# EAGLE board HackmodWear_workingcopy3 (EAGLE 9.1.0)
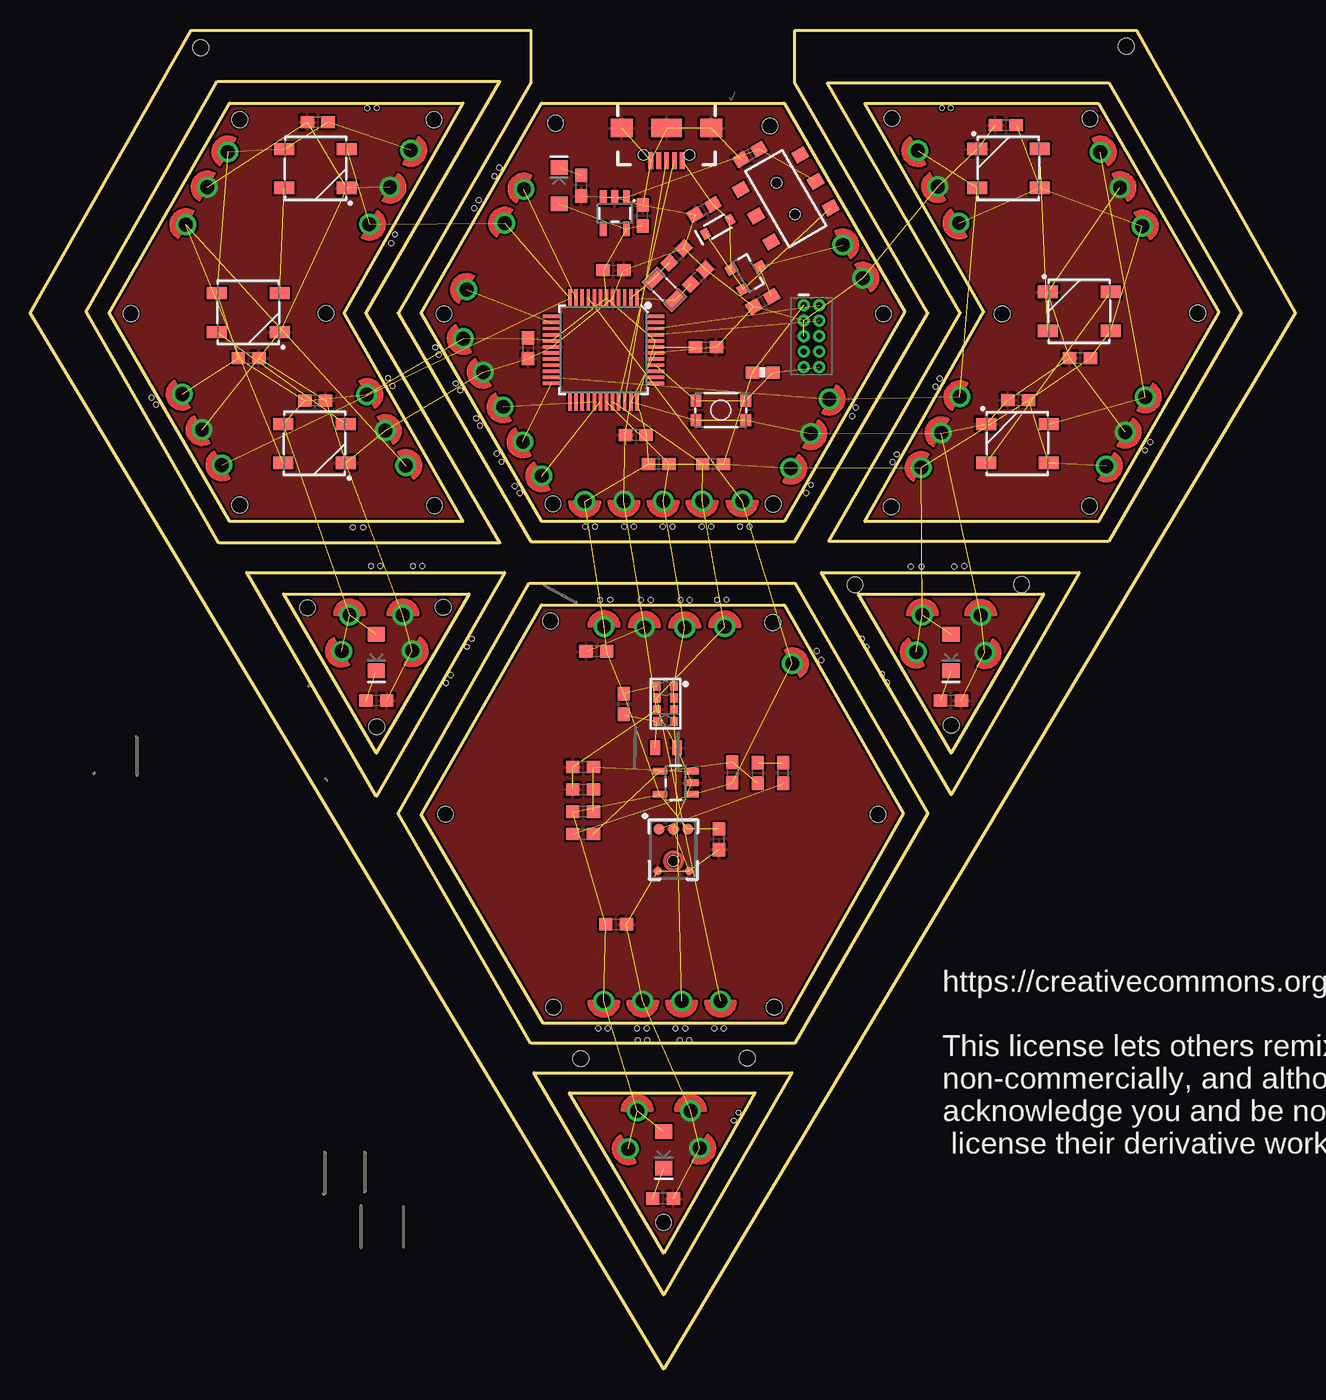
[diagram p0: board, top side]
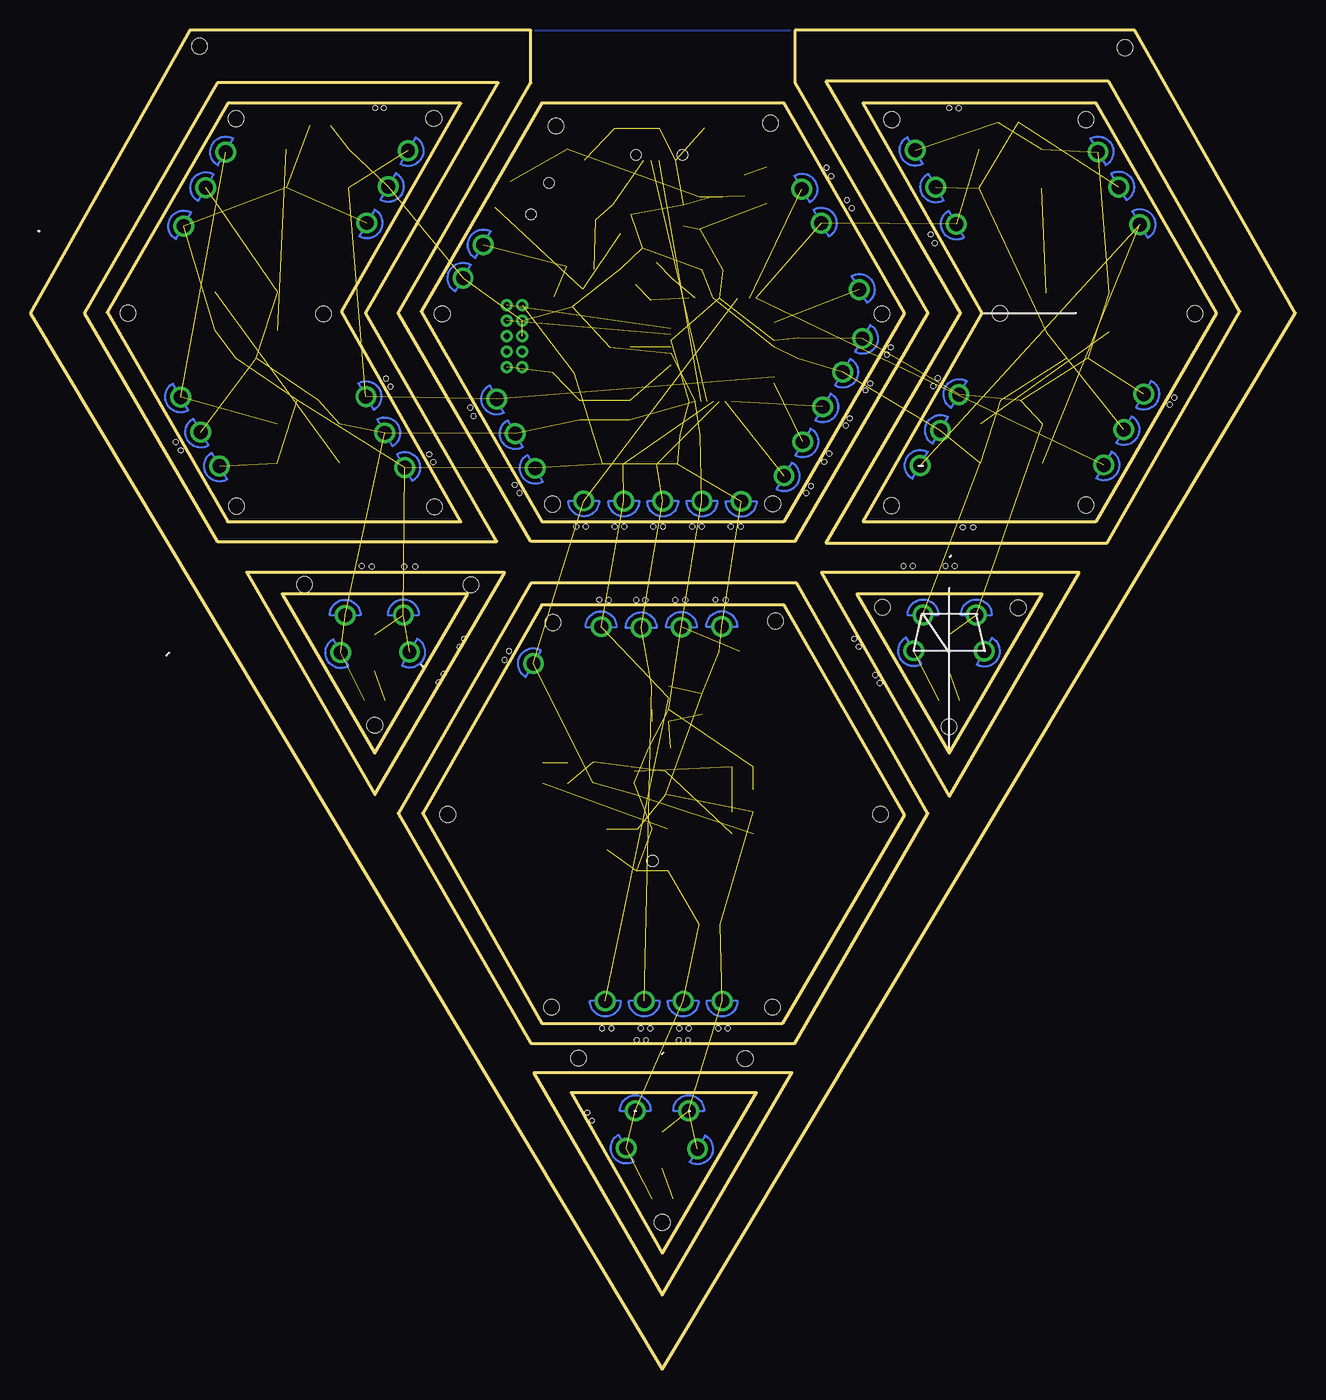
[diagram p1: board, bottom side, seen from below]

Size 104.01 x 110.11 mm. Coordinates in mm from the lower left corner, seen from the top.
Outline: 16.38,104.14 35.56,104.14 25.78,86.87 35.56,69.72 16.38,69.72 6.48,86.87 16.38,104.14
Outline: 15.37,105.92 38.61,105.92 27.56,86.87 38.61,67.94 15.49,67.94 4.57,87 15.37,105.92
Outline: 13.21,110.11 41.15,110.11 41.15,105.79 30.23,86.87 41.15,68.07 62.86,68.07 73.79,86.87 62.86,105.79 62.86,110.11 90.93,110.11 104.01,86.87 52.07,0 0,86.87 13.21,110.11
Outline: 42.04,104.14 61.98,104.14 71.88,87 61.98,69.72 42.04,69.72 32.13,86.87 42.04,104.14
Outline: 65.53,105.79 88.65,105.79 99.57,86.87 88.65,68.07 65.66,68.07 76.45,86.87 65.53,105.79
Outline: 17.78,65.53 38.99,65.53 28.45,47.12 17.78,65.53
Outline: 20.83,63.75 36.07,63.75 28.45,50.67 20.83,63.75
Outline: 41.02,64.64 62.86,64.64 73.79,45.72 62.86,26.8 41.15,26.8 30.23,45.72 41.02,64.64
Outline: 42.04,62.87 61.98,62.87 71.75,45.72 61.98,28.45 42.16,28.45 32.13,45.59 42.04,62.87
Outline: 65.02,65.53 86.23,65.53 75.69,47.24 65.02,65.53
Outline: 68.07,63.75 83.31,63.75 75.69,50.67 68.07,63.75
Outline: 41.4,24.38 62.61,24.38 52.07,6.1 41.4,24.38
Outline: 44.32,22.73 59.56,22.73 52.07,9.53 44.32,22.73
Outline: 87.8,69.7 68.62,69.7 78.4,86.97 68.62,104.12 87.8,104.12 97.7,86.92 87.8,69.7
Copper layers (1*16): Top 0.035mm / dielectric 1.5mm / Bottom 0.035mm
Design rules "SparkFun-2-layer-TIGHT": minimum track width 7mil, minimum drill 15mil, track to track 7mil, track to pad 7mil, pad to pad 7mil, via to via 7mil, smd to smd 7mil, copper to edge 7mil, drill to drill 7mil, minimum pad ring 7mil, minimum via ring 7mil, stop-mask expansion 4mil, vias tented up to drill 25mil, thermal gap 10mil
Holes 1.27 mm at 33.22,71.02 33.19,102.77 43.01,29.76 69.69,45.62 61.08,71.15 22.8,62.61 28.47,52.83 61.16,29.76 33.95,62.65 90.11,108.81 70.84,102.87 70.78,70.93 87.12,102.85 42.75,61.54 61.03,61.41 42.97,71.17 34,86.8 43.17,102.48 8.27,86.82 17.22,102.76 17.21,71.07 79.91,86.79 87.08,70.99 24.3,86.84 14.01,108.69 34.12,45.65 60.8,102.25 70.14,86.79 95.98,86.86 67.79,64.5 75.71,52.97 81.49,64.53 45.24,25.54 52.06,12.07 58.94,25.57
Holes 0.38 mm at 27.69,103.72 28.47,103.73 29.67,92.61 29.97,93.32 29.4,81.51 29.77,80.85 33.29,84.04 33.58,83.45 34.97,81.07 35.35,80.5 36.96,77.6 36.65,78.2 38.33,75.29 38.73,74.62 39.83,72.62 40.23,72.06 45.61,69.3 46.42,69.3 48.83,69.3 49.61,69.29 52.01,69.3 52.8,69.31 55.19,69.31 55.97,69.3 58.34,69.3 59.12,69.3 64.66,59.07 65.03,58.33 57.23,63.27 56.45,63.26 54.21,63.26 53.45,63.26 51.01,63.27 50.17,63.27 47.68,63.28 46.84,63.27 28.01,66.04 27.36,69.23 26.5,69.24 28.77,66.04 31.46,66.04 32.23,66.04 92.07,76.26 91.65,75.57 74.78,81.47 67.85,79.08 74.41,80.81 71.22,75.24 70.88,74.59 36.49,95.47 36.87,96.13 38.15,98.12 38.55,98.82 67.58,78.39 63.8,72.06 64.19,72.73 36.28,60.07 35.89,59.42 34.55,57.09 34.17,56.42 72.38,66.01 73.26,66.02 75.95,66.02 76.78,66.04 70.43,56.46 70.02,57.18 68.74,59.4 68.35,60.07 49.95,27.06 50.71,27.06 53.4,27.06 54.17,27.06 58.22,21.09 57.83,20.44 57.01,28.02 56.23,28.01 53.84,28.02 53.04,28.02 50.66,28.02 49.88,28.02 47.46,28.03 46.68,28.02 74.95,103.73 75.67,103.73 9.96,79.91 10.32,79.32

## Footprints (pad centres in the part's own frame; a part is rotated, then mirrored left to right if it is on the bottom)
0603 = smd 1.1 x 1: 1 -0.85,0; 2 0.85,0
0805 = smd 0.8 x 1.2: 1 -0.9,0; 2 0.9,0
LED-1206 = smd 1.2 x 1.4: A -1.5,0; C 1.5,0
WS2812B = smd 1.651 x 1: 1 2.577,-1.6; 2 2.577,1.6; 3 -2.577,1.6; 4 -2.577,-1.6
SOD-323 = smd 0.63 x 0.83: A 1.15,0; C -1.15,0
1X01 = drill 1.143: P$1 0,0
USB-AB-MICRO-SMD_V03 = smd 1.4 x 0.4: D+1 2.7,0; D-1 2.7,0.65; GND1 2.7,-1.3; ID1 2.7,-0.65; VBUS1 2.7,1.3 | smd 1.5 x 1.8: SHIELD1 0,3.68; SHIELD3 0,-3.68 | smd 1.5 x 2.5: SHIELD2 0,0 | hole 0.85: 2.2,1.9; 2.2,-1.9
2X5-PTH-1.27MM = drill 0.508 pad 1: 1 -2.54,-0.635; 2 -2.54,0.635; 3 -1.27,-0.635; 4 -1.27,0.635; 5 0,-0.635; 6 0,0.635; 7 1.27,-0.635; 8 1.27,0.635; 9 2.54,-0.635; 10 2.54,0.635
SOT23-3 = smd 0.8 x 0.9: 1 -0.95,-1; 2 0.95,-1; 3 0,1.1
0603-RES@1 = smd 1.1 x 1: 1 -0.85,0; 2 0.85,0
TACTILE_SWITCH_SMD_4.6X2.8MM = smd 0.9 x 1: 1 -2.05,-0.8; 2 2.05,-0.8; 3 2.05,0.8; 4 -2.05,0.8
SWITCH_DPDT_SMD_AYZ0202 = smd 1 x 1.15: 1 -2.5,2.825; 2 0,2.825; 3 2.5,2.825; 4 -2.5,-2.825; 5 0,-2.825; 6 2.5,-2.825 | hole 0.85: 1.5,0; -1.5,0
TQFP-48 = smd 1.5 x 0.28: 1 -4.25,2.75; 2 -4.25,2.25; 3 -4.25,1.75; 4 -4.25,1.25; 5 -4.25,0.75; 6 -4.25,0.25; 7 -4.25,-0.25; 8 -4.25,-0.75; 9 -4.25,-1.25; 10 -4.25,-1.75; 11 -4.25,-2.25; 12 -4.25,-2.75; 25 4.25,-2.75; 26 4.25,-2.25; 27 4.25,-1.75; 28 4.25,-1.25; 29 4.25,-0.75; 30 4.25,-0.25; 31 4.25,0.25; 32 4.25,0.75; 33 4.25,1.25; 34 4.25,1.75; 35 4.25,2.25; 36 4.25,2.75 | smd 0.28 x 1.5: 13 -2.75,-4.25; 14 -2.25,-4.25; 15 -1.75,-4.25; 16 -1.25,-4.25; 17 -0.75,-4.25; 18 -0.25,-4.25; 19 0.25,-4.25; 20 0.75,-4.25; 21 1.25,-4.25; 22 1.75,-4.25; 23 2.25,-4.25; 24 2.75,-4.25; 37 2.75,4.25; 38 2.25,4.25; 39 1.75,4.25; 40 1.25,4.25; 41 0.75,4.25; 42 0.25,4.25; 43 -0.25,4.25; 44 -0.75,4.25; 45 -1.25,4.25; 46 -1.75,4.25; 47 -2.25,4.25; 48 -2.75,4.25
SOT23-5 = smd 0.55 x 1.2: 1 -0.95,-1.3; 2 0,-1.3; 3 0.95,-1.3; 4 0.95,1.3; 5 -0.95,1.3
ADMP401 = smd 0.9 x 0.9: 1 -1.2,2.62; 5 1.2,2.62; 6 0,2.62 | smd 0.7 x 0.7: 2 1.3,-0.8; 4 -1.3,-0.8 | hole 0.9: 0,0
APDS-9960 = smd 0.6 x 0.72: 1 0.7,1.455; 2 0.7,0.485; 3 0.7,-0.485; 4 0.7,-1.455; 5 -0.7,-1.455; 6 -0.7,-0.485; 7 -0.7,0.485; 8 -0.7,1.455
CRYSTAL-SMD-3.2X1.5MM = smd 1 x 1.8: P$1 -1.25,0; P$2 1.25,0

## Placement (x,y rotation side)
C1  0.1uF  [0603]  49.77,76.82 180 top
C2  0.1uF  [0603]  55.55,84.05 0 top
C3  0.1uF  [0603]  47.94,90.39 0 top
C4  0.1uF  [0603]  40.91,83.96 270 top
C5  15pF  [0603]  54.9,89.85 225 top
C6  15pF  [0603]  53.12,91.59 45 top
C7  0.1uF  [0603]  59.16,99.91 210 top
C8  0.1uF  [0603]  48.16,36.59 0 top
C9  10uF  [0603]  60.22,87.8 210 top
C10  10uF  [0603]  50.34,94.89 90 top
C13  10uF  [0805]  52.27,51.1 0 top
C15  1.0uF  [0603]  46.54,59.04 180 top
C17  100pF  [0603]  57.72,49.07 270 top
C18  0.1uF  [0603]  56.62,43.58 90 top
C19  4.7uF  [0603]  61.9,49.02 90 top
C20  1.0uF  [0603]  45.44,49.52 180 top
C21  0.1uF  [0603]  17.94,83.15 0 top
C22  0.1uF  [0603]  23.62,102.55 180 top
C23  0.1uF  [0603]  23.42,79.67 0 top
C24  0.1uF  [0603]  80.2,102.3 180 top
C25  0.1uF  [0603]  86.3,83.15 180 top
C26  0.1uF  [0603]  81.22,79.69 180 top
D1  [LED-1206]  75.69,58.93 270 top
D2  WS2812B  [WS2812B]  80.42,98.76 0 top
D3  [LED-1206]  52.07,18.03 270 top
D4  [LED-1206]  28.45,58.93 270 top
D5  WS2812B  [WS2812B]  86.23,87 0 top
D6  WS2812B  [WS2812B]  81.15,76.14 0 top
D7  [LED-1206]  43.47,97.34 90 top
D8  1A/23V/620mV  [SOD-323]  56.51,93.96 30 top
D31  WS2812B  [WS2812B]  23.44,98.75 180 top
D32  WS2812B  [WS2812B]  17.91,86.9 180 top
D33  WS2812B  [WS2812B]  23.36,76.14 180 top
J3  [1X01]  40.5,76.27 120 top
J4  [1X01]  30.63,62.03 0 top
J5  [1X01]  42.05,73.47 120 top
J6  [1X01]  37.23,82 120 top
J7  [1X01]  73.24,74.16 60 top
J8  [1X01]  40.58,97.05 60 top
J9  [1X01]  39,94.25 60 top
J10  [1X01]  58.52,71.41 180 top
J11  [1X01]  48.8,71.4 180 top
J12  [1X01]  52.03,71.4 180 top
J13  [1X01]  56.74,30.27 180 top
J14  [1X01]  65.67,79.79 243 top
J15  [1X01]  57.09,61.06 0 top
J16  [1X01]  53.79,60.98 0 top
J17  [1X01]  47.17,61.07 0 top
J18  [1X01]  38.86,79.15 120 top
J19  [1X01]  50.49,61.02 0 top
J20  [1X01]  26.24,62.03 0 top
J23  [1X01]  35.87,88.8 60 top
J25  [1X01]  31.27,100.24 240 top
J26  [1X01]  15.75,74.37 120 top
J27  [1X01]  29.18,77.2 300 top
J28  [1X01]  47.14,30.27 180 top
J29  [1X01]  50.34,30.27 180 top
J32  [1X01]  27.88,94.17 240 top
J33  [1X01]  14.54,97.22 60 top
J34  [1X01]  16.24,100.11 60 top
J37  [1X01]  62.65,58.02 300 top
J38  [1X01]  55.23,71.41 180 top
J39  [1X01]  53.54,30.27 180 top
J41  [1X01]  12.79,94.13 60 top
J42  [1X01]  76.43,79.98 60 top
J43  [1X01]  29.57,97.22 240 top
J44  [1X01]  27.66,80.16 300 top
J45  [1X01]  12.48,80.19 120 top
J46  [1X01]  14.11,77.28 120 top
J47  [1X01]  76.35,94.27 120 top
J48  [1X01]  87.96,100.1 300 top
J49  [1X01]  89.59,97.17 300 top
J50  [1X01]  91.66,79.96 240 top
J51  [1X01]  74.6,97.27 120 top
J52  [1X01]  91.41,94.02 300 top
J53  [1X01]  72.97,100.22 120 top
J54  [1X01]  30.86,74.33 300 top
J55  [1X01]  74.88,77.01 60 top
J56  [1X01]  35.6,84.77 120 top
J57  [1X01]  88.46,74.28 240 top
J58  [1X01]  90,77.07 240 top
J59  [1X01]  78.48,58.93 240 top
J62  [1X01]  72.84,58.97 120 top
J63  [1X01]  78.13,62 0 top
J64  [1X01]  73.34,62.04 0 top
J65  [1X01]  54.28,21.25 0 top
J68  [1X01]  49.17,18.13 120 top
J69  [1X01]  55.02,18.18 240 top
J70  [1X01]  49.89,21.25 0 top
J71  [1X01]  66.78,92.46 300 top
J72  [1X01]  68.44,89.73 300 top
J73  [1X01]  45.57,71.37 180 top
J74  [1X01]  31.38,59.08 240 top
J75  [1X01]  64.15,76.94 240 top
J76  [1X01]  62.5,74.09 240 top
J77  [1X01]  25.59,59.05 120 top
JP3  [USB-AB-MICRO-SMD_V03]  52.3,102.07 270 top
JP5  CORTEX_DEBUGPTH  [2X5-PTH-1.27MM]  64.22,84.96 270 top
Q1  ZXMP6A13F  [SOT23-3]  58.98,90.13 300 top
R1  10K  [0603-RES@1]  60.21,81.97 180 top
R2  330  [0603]  28.45,54.99 180 top
R3  4.7k  [0603]  51.66,74.45 180 top
R4  100k  [0603]  55.38,95.37 30 top
R5  4.7k  [0603]  56.13,74.45 180 top
R6  1k  [0603]  45.3,97.34 90 top
R9  10k  [0603]  45.44,45.84 180 top
R11  10k  [0603]  45.44,47.68 0 top
R12  1.5k  [0603]  59.82,49.02 90 top
R13  100k  [0603]  45.44,44 0 top
R15  330  [0603]  75.69,54.99 180 top
R17  330  [0603]  52.02,14.02 180 top
R29  0  [0603]  48.79,54.7 90 top
S1  RESET  [TACTILE_SWITCH_SMD_4.6X2.8MM]  56.78,78.86 0 top
S2  [SWITCH_DPDT_SMD_AYZ0202]  62.11,96.28 300 top
U1  ATSAMD21G-A  [TQFP-48]  47.11,83.83 270 top
U2  3.3V  [SOT23-5]  48.05,95.07 180 top
U5  OPA344  [SOT23-5]  53.06,48.22 90 top
U6  ADMP401  [ADMP401]  52.87,41.79 0 top
U7  APDS-9960  [APDS-9960]  52.21,54.72 0 top
U$1  [A5L-LOC]  -21.34,-11.05 0 top  (outside the outline)
Y1  32.768kHz  [CRYSTAL-SMD-3.2X1.5MM]  52.14,88.82 315 top

## Library data of the parts
C1-C4 C7 C8 C18 C21-C26 = SparkFun-Capacitors; PROD_ID: CAP-00810
C5 C6 = SparkFun-Capacitors; PROD_ID: CAP-07881
C9 C10 = SparkFun-Capacitors; PROD_ID: CAP-11015
C13 = SparkFun-Capacitors; PROD_ID: CAP-11330
C15 C20 = SparkFun-Capacitors; PROD_ID: CAP-00868
C17 = SparkFun-Capacitors; PROD_ID: CAP-07883
C19 = SparkFun-Capacitors; PROD_ID: CAP-08280
D1 D3 D4 D7 = SparkFun-LED
D2 D5 D6 D31-D33 = SparkFun-LED; PROD_ID: DIO-12503
D8 = SparkFun-DiscreteSemi; PROD_ID: DIO-11623
J3-J20 J23 J25-J29 J32-J34 J37-J39 J41-J59 J62-J65 J68-J77 = SparkFun-Connectors
JP3 = SparkFun-Connectors; PROD_ID: CONN-11794
JP5 = samd21-temp
Q1 = SparkFun-DiscreteSemi; PROD_ID: TRANS-08285
R1 R9 R11 = SparkFun-Resistors; PROD_ID: RES-00824
R2 R6 R15 R17 = SparkFun-Resistors; PROD_ID: RES-00818
R3 R5 = SparkFun-Resistors; PROD_ID: RES-07857
R4 R13 = SparkFun-Resistors; PROD_ID: RES-07828
R12 = SparkFun-Resistors; PROD_ID: RES-08306
R29 = SparkFun-Resistors; PROD_ID: RES-08609
S1 = samd21-temp; PROD_ID: SWCH-13065
S2 = SparkFun-Switches; PROD_ID: SWCH-08179; SF_ID: COM-00597
U1 = samd21-temp; PROD_ID: IC-13064
U2 = SparkFun-PowerIC; PROD_ID: VREG-12457
U5 = SparkFun
U6 = SparkFun-Sensors; PROD_ID: IC-09773
U7 = SparkFun-Sensors; PROD_ID: SEN-12005
U$1 = frames
Y1 = samd21-temp; PROD_ID: XTAL-13062

## Nets
3.3V: C1.1 C3.1 C4.1 C8.1 C10.1 C15.1 C18.2 C21.1 C22.1 C23.1 C24.1 C25.1 C26.1 D1.A D2.1 D3.A D4.A D5.1 D6.1 D7.A D31.1 D32.1 D33.1 J7.P$1 J17.P$1 J20.P$1 J25.P$1 J28.P$1 J34.P$1 J44.P$1 J45.P$1 J47.P$1 J52.P$1 J56.P$1 J57.P$1 J62.P$1 J64.P$1 J68.P$1 J70.P$1 J73.P$1 J76.P$1 J77.P$1 JP5.1 R1.2 R3.2 R5.1 R9.2 R29.2 U1.6 U1.17 U1.36 U1.44 U2.5 U5.5 U6.5 U7.8
!RESET: JP5.10 R1.1 S1.3 S1.4 U1.40
A0: U1.3
A1: U1.7
A2: U1.8
A3: C17.2 J10.P$1 J37.P$1 R13.1 U1.9 U5.1
D0/RXI: U1.16
D1/TXO: U1.15
D2: D2.4 J14.P$1 J42.P$1 J53.P$1 U1.23
D3: J23.P$1 U1.14
D4: U1.13
D5: J3.P$1 U1.24
D6: J18.P$1 U1.29
D7: J5.P$1 U1.30
D8: J8.P$1 U1.11
D9: D31.4 J9.P$1 J26.P$1 J32.P$1 U1.12
D10/SS: U1.27
D11/MOSI: U1.25
D12/MISO: U1.28
D13/SCK: U1.26
DO: D33.2 J41.P$1 J54.P$1
DOUT: D6.2 J48.P$1 J50.P$1
GND: C1.2 C2.2 C3.2 C4.2 C5.1 C6.2 C7.2 C8.2 C9.2 C10.2 C13.2 C15.2 C18.1 C20.2 C21.2 C22.2 C23.2 C24.2 C25.2 C26.2 D2.3 D5.3 D6.3 D31.3 D32.3 D33.3 J4.P$1 J6.P$1 J11.P$1 J19.P$1 J27.P$1 J29.P$1 J33.P$1 J43.P$1 J46.P$1 J49.P$1 J51.P$1 J55.P$1 J58.P$1 J59.P$1 J63.P$1 J65.P$1 J69.P$1 J72.P$1 J74.P$1 J75.P$1 JP3.GND1 JP3.SHIELD1 JP3.SHIELD2 JP3.SHIELD3 JP5.3 JP5.5 R2.1 R4.1 R6.1 R11.1 R15.1 R17.1 S1.1 S1.2 U1.5 U1.18 U1.35 U1.42 U2.2 U5.2 U6.2 U6.4 U6.6 U7.6
ID: JP3.ID1
IN: C7.1 S2.2 U2.1 U2.3
LEDA: C13.1 R29.1 U7.5
N$1: D4.C R2.2
N$2: C5.2 U1.1 Y1.P$2
N$3: C19.1 U6.1
N$4: C6.1 U1.2 Y1.P$1
N$5: U7.3 U7.4
N$6: C17.1 R12.1 R13.2 U5.4
N$7: D7.C R6.2
N$8: D8.C Q1.2 S2.3
N$10: C19.2 R12.2
N$11: C20.1 R9.1 R11.2 U5.3
N$12: D1.C R15.2
N$14: D31.2 D32.4
N$15: D3.C R17.2
N$16: D32.2 D33.4
N$22: D2.2 D5.4
N$23: D5.2 D6.4
SCL: J13.P$1 J15.P$1 J38.P$1 R5.2 U1.32 U7.7
SDA: J12.P$1 J16.P$1 J39.P$1 R3.1 U1.31 U7.1
SWCLK: JP5.4 U1.45
SWDIO: JP5.2 U1.46
USB_D+: JP3.D+1 U1.34
USB_D-: JP3.D-1 U1.33
VBUS: D8.A JP3.VBUS1 Q1.1 R4.2
VDDCORE: C2.1 U1.43
VIN: C9.1 J71.P$1 Q1.3

## Tracks (layer width: path | path; a pad name or v marks a point on that pad's centre or on a via)
3.3V  (55 unrouted)
!RESET  (4 unrouted)
A3  (5 unrouted)
D2  (4 unrouted)
D3  (1 unrouted)
D5  (1 unrouted)
D6  (1 unrouted)
D7  (1 unrouted)
D8  (1 unrouted)
D9  (4 unrouted)
DO  (2 unrouted)
DOUT  (2 unrouted)
GND  (69 unrouted)
  pour Top: 13.28,110.12 90.6,110.12 104.01,86.9 52,1.1 -0.15,86.86
  pour Bottom: 13.28,110.09 88.04,110.13 90.61,110.13
IN  (3 unrouted)
LEDA  (2 unrouted)
N$1  (1 unrouted)
N$2  (2 unrouted)
N$3  (1 unrouted)
N$4  (2 unrouted)
N$5  (1 unrouted)
N$6  (3 unrouted)
N$7  (1 unrouted)
N$8  (2 unrouted)
N$10  (1 unrouted)
N$11  (3 unrouted)
N$12  (1 unrouted)
N$14  (1 unrouted)
N$15  (1 unrouted)
N$16  (1 unrouted)
N$22  (1 unrouted)
N$23  (1 unrouted)
SCL  (5 unrouted)
SDA  (5 unrouted)
SWCLK  (1 unrouted)
SWDIO  (1 unrouted)
USB_D+  (1 unrouted)
USB_D-  (1 unrouted)
VBUS  (3 unrouted)
VDDCORE  (1 unrouted)
VIN  (2 unrouted)

## Text on the board
tPlace: https://creativecommons.org/licenses/by-nc-sa/4.0/legalcode / / This license lets others remix, tweak, and build upon your work / non-commercially, and although their new works must also / acknowledge you and be non-commercial, they don’t have to / license their derivative works on the same terms.